# Altium PCB OCB_Board2.PcbDoc
Units mil, origin at the board's own origin, x right, y up, seen from the top; angles counter-clockwise.
Board outline 3500 x 3065 mil, 2 copper layers (Top Layer, Bottom Layer); 47 components, 33 nets, 154 pads, 20 vias.
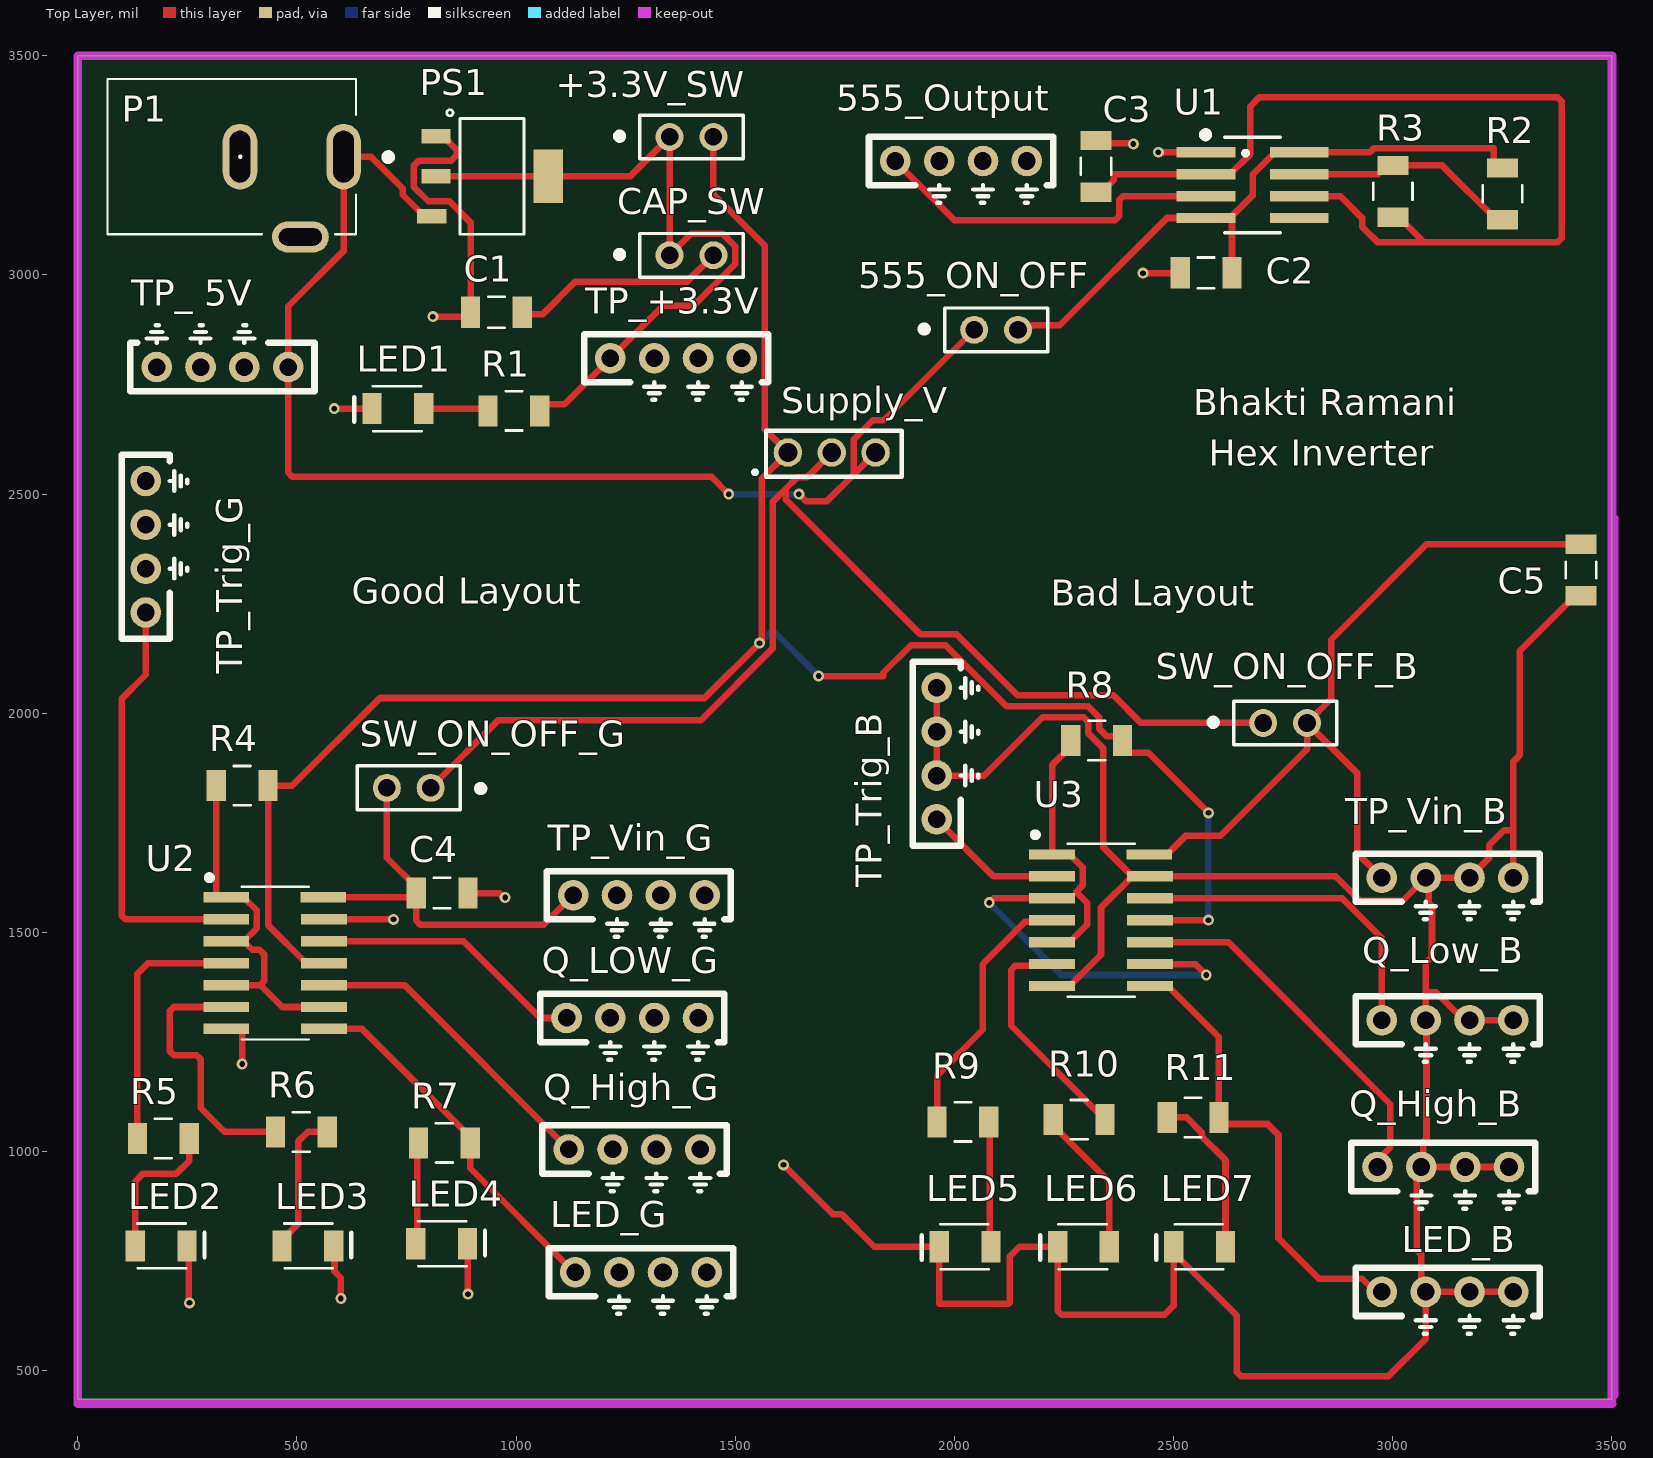
[diagram p0: Top Layer view]
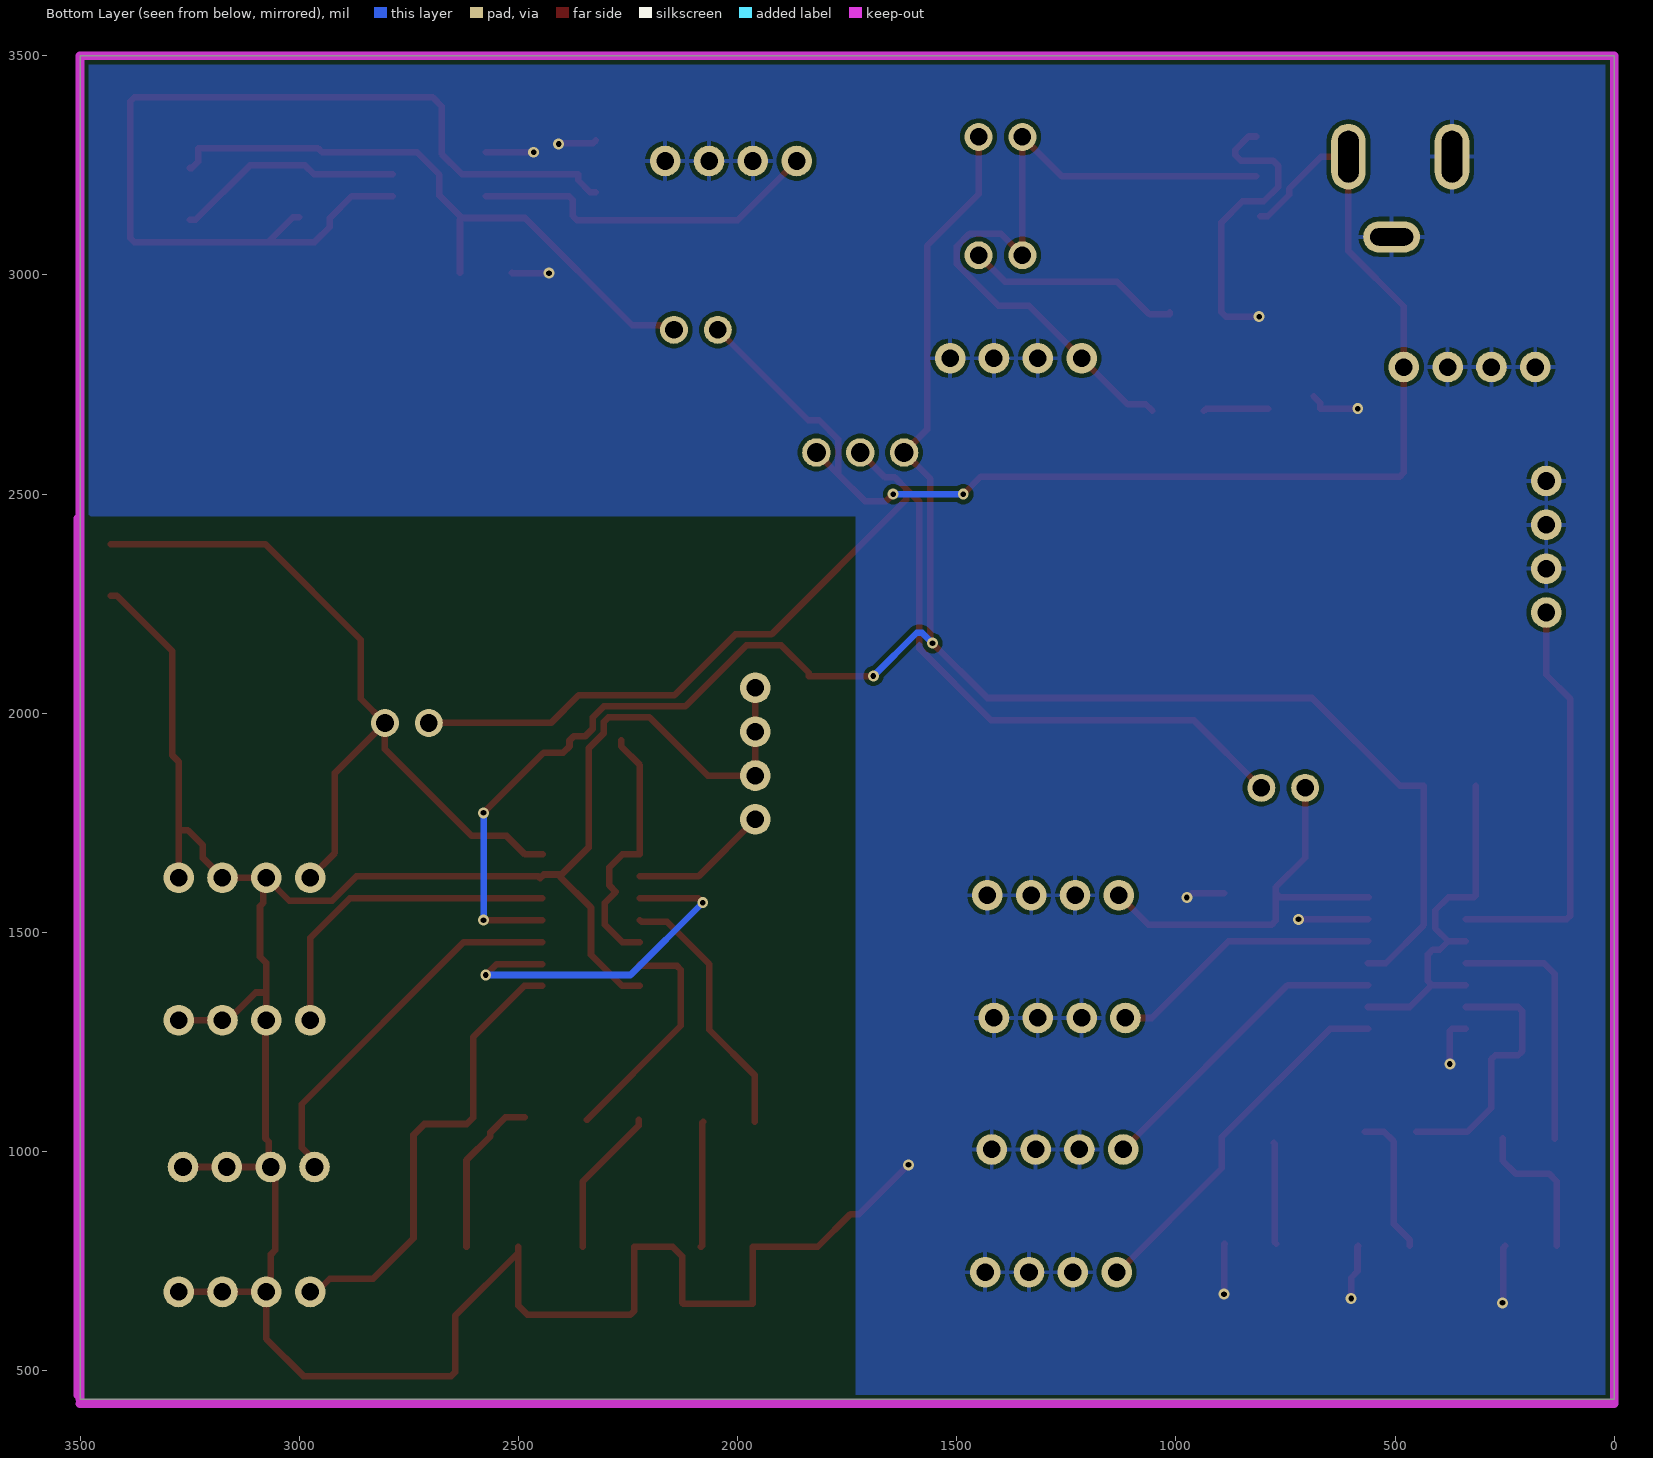
[diagram p1: Bottom Layer view, seen from below]
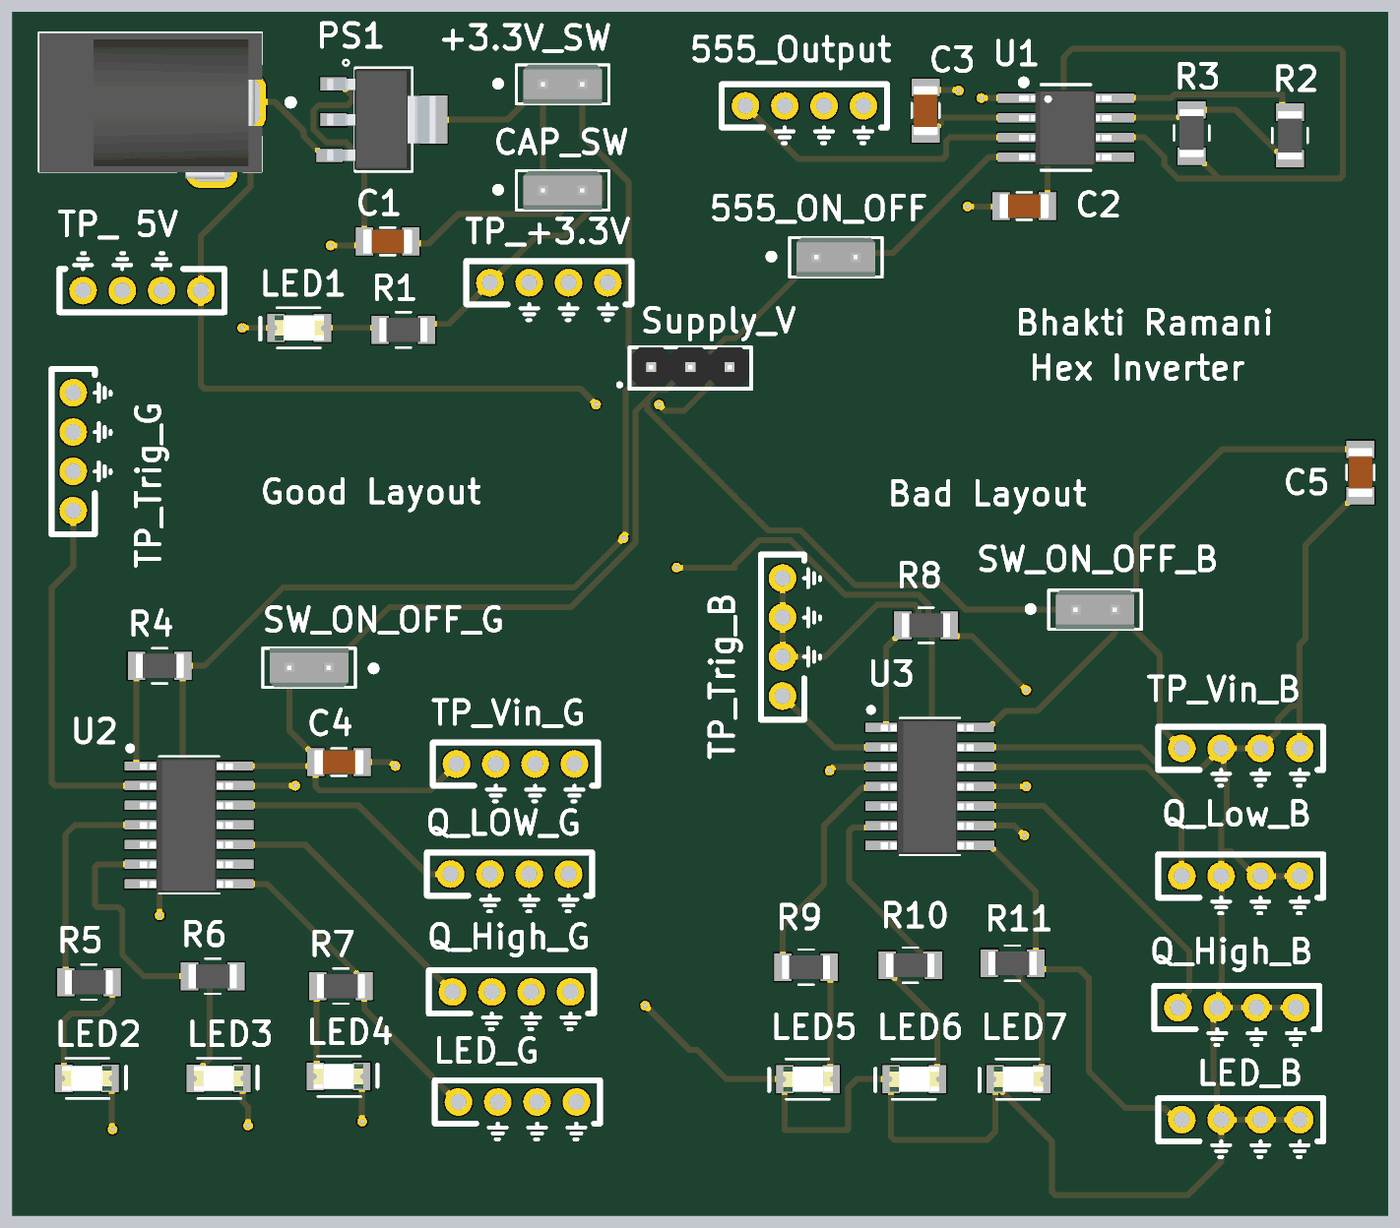
[diagram p2: 3D render of the assembled board from above, using the file's embedded part models]

## Layer stack, top to bottom
Top Solder: solder mask 0.4, Solder Resist, Dk 3.5
Top Layer: signal copper 1.4
Dielectric 1: dielectric 12.6, FR-4, Dk 4.8
Bottom Layer: signal copper 1.4
Bottom Solder: solder mask 0.4, Solder Resist, Dk 3.5

## Board outline
0,435 3500,435 3500,3500 0,3500

## Design rules (kind name [scope] priority, off if disabled: settings)
BoardOutlineClearance [All] p1: gap=10 ignorepadtopadclearanceinfootprint=FALSE except(0: Arc-SplitContinuation Track-SplitContinuation SMDPad-SplitContinuation THPad-SplitContinuation Via-SplitContinuation Fill-SplitContinuation Poly-SplitContinuation Region-SplitContinuation Text-SplitContinuation)
Clearance [All] p1: gap=10 ignorepadtopadclearanceinfootprint=FALSE
PlaneClearance [All] p1: clearance=10
PlaneConnect [All] p1: planeconnectstyle=Direct reliefexpansion=20 reliefentries=4 reliefconductorwidth=10 reliefairgap=10
PolygonConnect [All] p1: thpad.connectstyle=Relief thpad.reliefconductorwidth=10 thpad.reliefentries=4 thpad.polygonreliefangle="90 Angle" thpad.airgapwidth=10 smdpad.connectstyle=Direct smdpad.reliefconductorwidth=10 smdpad.reliefentries=4 smdpad.polygonreliefangle="90 Angle" smdpad.airgapwidth=10 via.connectstyle=Direct via.reliefconductorwidth=10 via.reliefentries=4 via.polygonreliefangle="90 Angle" via.airgapwidth=10
RoutingVias [All] p1: holewidth=13 width=25 viastyle="Through Hole" minholewidth=13 minwidth=25 maxholewidth=60 maxwidth=80
SolderMaskExpansion [All] p1: expansion=4 istentingtop=FALSE
SupplyNets "Schematic Supply Nets" [InNet('GND')] p1: voltage=0.000
Width "Schematic Width Constraint_8" [InNet('NetC5_2')] p1: maxlimit=100 minlimit=10 preferedwidth=20 minimp=50.000000 maximp=50.000000 favimp=50.000000
Width "Schematic Width Constraint_3" [InNet('Supply_V')] p2: maxlimit=100 minlimit=10 preferedwidth=20 minimp=50.000000 maximp=50.000000 favimp=50.000000
Width "Schematic Width Constraint_7" [InNet('Net+3.3V_SW_1')] p3: maxlimit=100 minlimit=10 preferedwidth=20 minimp=50.000000 maximp=50.000000 favimp=50.000000
Width "Schematic Width Constraint_5" [InNet('NetC4_2')] p4: maxlimit=100 minlimit=10 preferedwidth=20 minimp=50.000000 maximp=50.000000 favimp=50.000000
Width "Schematic Width Constraint_2" [InNet('Net555_ON_OFF_2')] p5: maxlimit=100 minlimit=10 preferedwidth=20 minimp=50.000000 maximp=50.000000 favimp=50.000000
Width "Schematic Width Constraint_1" [InNet('+5_V')] p6: maxlimit=100 minlimit=10 preferedwidth=20 minimp=50.000000 maximp=50.000000 favimp=50.000000
Width "Schematic Width Constraint" [InNet('+3.3V')] p7: maxlimit=100 minlimit=10 preferedwidth=20 minimp=50.000000 maximp=50.000000 favimp=50.000000
Width [All] p8: maxlimit=100 minlimit=6 preferedwidth=6 minimp=50.000000 maximp=50.000000 favimp=50.000000
28 further rules are at their usual default settings.

## Components (designator, comment, footprint, x,y, rotation, side; value= is the part's Value field where it differs from the comment)
555_ON_OFF "SW_2Pin_100mil_Switch" 2Pin-Header-Conn 2045,2875 r0 top
555_Output "555_Output" TP10x_Probe 2015,3260 r0 top
+3.3V_SW "SW_2Pin_100mil_Switch" 2Pin-Header-Conn 1350,3315 r0 top
C1 "22uF" 1206_Passive_Capacitor 955,2915 r0 top
C2 "22uF" 1206_Passive_Capacitor 2574,3005 r180 top
C3 "1uF" 1206_Passive_Capacitor 2323.04,3247.96 r90 top
C4 "22uF" 1206_Passive_Capacitor 831,1590 r180 top
C5 "22uF" 1206_Passive_Capacitor 3429.32,2327.02 r90 top
CAP_SW "SW_2Pin_100mil_Switch" 2Pin-Header-Conn 1350,3045 r0 top
LED1 "Red" LED_1206 730,2695 r180 top
LED2 "Red" LED_1206 190,785 r0 top
LED3 "Red" LED_1206 525,785 r0 top
LED4 "Red" LED_1206 830,790 r0 top
LED5 "Red" LED_1206 2024.32,783.02 r180 top
LED6 "Red" LED_1206 2294.32,783.02 r180 top
LED7 "Red" LED_1206 2559.32,783.02 r180 top
LED_B "10x Probe TP" TP10x_Probe 3125,680 r0 top
LED_G "10x Probe TP" TP10x_Probe 1285,725 r0 top
P1 "Power Jack" Power_Jack 606.22,3270 r180 top value="CONN PWR JACK 2X5.5MM SOLDER"
PS1 "AMS1117-5.0" LDO 945,3225 r270 top value="IC REG LINEAR 5V 1A SOT223"
Q_High_B "10x Probe TP" TP10x_Probe 3115,965 r0 top
Q_High_G "10x Probe TP" TP10x_Probe 1270,1005 r0 top
Q_Low_B "10x Probe TP" TP10x_Probe 3125,1300 r0 top
Q_LOW_G "10x Probe TP" TP10x_Probe 1265,1305 r0 top
R1 "47 Ohms" 1206_Passive_Resitor 995,2690 r0 top value=47Ohm
R2 "1k" 1206_Passive_Resitor 3250,3185 r90 top value=1K
R3 "1k" 1206_Passive_Resitor 3000,3191 r90 top value=1K
R4 "1k" 1206_Passive_Resitor 375,1835 r0 top value="1K Ohm"
R5 "2Ohm" 1206_Passive_Resitor 195,1030 r180 top value="50 Ohm"
R6 "2Ohm" 1206_Passive_Resitor 510,1045 r180 top value="50 Ohm"
R7 "2Ohm" 1206_Passive_Resitor 836.07,1020 r180 top value="50 Ohm"
R8 "1k" 1206_Passive_Resitor 2324.32,1938.02 r0 top value="1K Ohm"
R9 "2Ohm" 1206_Passive_Resitor 2019.32,1068.02 r180 top value="50 Ohm"
R10 "2Ohm" 1206_Passive_Resitor 2284.32,1073.02 r0 top value="50 Ohm"
R11 "2Ohm" 1206_Passive_Resitor 2544.32,1078.02 r180 top value="50 Ohm"
Supply_V "PREC003SAAN-RC" 3_PIN_100mil 1620,2595 r0 top value="CONN HEADER VERT 3POS 2.54MM"
SW_ON_OFF_B "SW_2Pin_100mil_Switch" 2Pin-Header-Conn 2704.32,1978.02 r0 top
SW_ON_OFF_G "SW_2Pin_100mil_Switch" 2Pin-Header-Conn 805,1830 r180 top
"TP_ 5V" "10x Probe TP" TP10x_Probe 330,2790 r180 top
TP_+3.3V "10x Probe TP" TP10x_Probe 1365,2810 r0 top
TP_Trig_B "10x Probe TP" TP10x_Probe 1959.32,1908.02 r90 top
TP_Trig_G "10x Probe TP" TP10x_Probe 155,2380 r90 top
TP_Vin_B "10x Probe TP" TP10x_Probe 3125,1625 r0 top
TP_Vin_G "10x Probe TP" TP10x_Probe 1280,1585 r0 top
U1 "LMC555CMX" TS555IDTTR 2680,3205 r0 top
U2 "SN74AHC14DR" HEX_74AC14 450,1430 r0 top
U3 "SN74AHC14DR" HEX_74AC14 2334.32,1528.02 r0 top

## Footprints (in the part's own frame and the unit in brackets; to place one, negate y for a bottom-side part, rotate by r counter-clockwise, add the part's x,y. Pads: shape width x height; smd on the part's side, far side on the other; paste and mask are expansions set on the pad)
2Pin-Header-Conn [mm]
  round 1.62 hole 1.02: 1(0,0) 2(2.54,0)
  silkscreen extent -3.02,-1.27 4.26,1.26, body extent -1.27,-1.27 3.81,1.27, height 8.13
3_PIN_100mil [mm]
  round 1.65 hole 1.1: 1(0,0) 2(2.54,0) 3(5.08,0)
  silkscreen extent -2,-1.4 6.6,1.27, body extent -1.14,-1.27 6.48,1.27, height 8.38
1206_Passive_Capacitor [mil]
  rect 44x71 smd: 1(-59,0) 2(59,0)
  silkscreen extent -19,-35 19,35, body extent -63,-31 63,32, height 50
1206_Passive_Resitor [mil]
  rect 44x71 smd: 1(-59,0) 2(59,0)
  silkscreen extent -19,-45 19,45, body extent -61,-31 61,31, height 26
HEX_74AC14 [mm]
  rect 2.65x0.6 smd: 1(-2.836,3.81) 2(-2.836,2.54) 3(-2.836,1.27) 4(-2.836,0) 5(-2.836,-1.27) 6(-2.836,-2.54) 7(-2.836,-3.81) 8(2.836,-3.81) 9(2.836,-2.54) 10(2.836,-1.27) 11(2.836,0) 12(2.836,1.27) 13(2.836,2.54) 14(2.794,3.81)
  silkscreen extent -3.94,-4.43 1.95,5.08, body extent -3.18,-4.35 2.82,4.3, height 1.75
LDO [mm]
  rect 0.838x1.7 smd: 1(-2.311,-3.25) 2(0,-3.25) 3(2.311,-3.5)
  rect 3.099x1.7 smd: 4(0,3.25)
  silkscreen extent -3.86,-2.62 3.35,1.85, body extent -3.25,-3.65 3.25,3.35, height 1.85
LED_1206 [mil]
  rect 44x71 smd: 1(-59,0) 2(59,0)
  silkscreen extent -54,-51 99,51, body extent -63,-31 63,31, height 28
Power_Jack [mm]
  oval 2x3.8 hole 1.2 slot 3 at 90 deg: 1(0,0) 2(6,0)
  oval 3.3x1.8 hole 1 slot 2.5 at 0 deg: 3(2.5,4.65)
  silkscreen extent -2.79,-4.5 13.68,4.5, body extent -0.76,-4.45 13.64,4.95, height 11.49
TP10x_Probe [mil] "Small Probs footprint"
  round 70 hole 40: 1(-150,0) 2(-50,0) 2(50,0) 2(150,0)
  silkscreen extent -210,-95 210,55
TS555IDTTR [mm] "IC OSC Single Timer 2.7MHz 8SOIC"
  rect 3.4x0.6 smd: 1(-2.7,1.905) 2(-2.7,0.635) 3(-2.7,-0.635) 4(-2.7,-1.905) 5(2.7,-1.905) 6(2.7,-0.635) 7(2.7,0.635) 8(2.7,1.905)
  silkscreen extent -2.85,-2.77 1.6,3.05, body extent -3.03,-2.48 2.96,2.43, height 1.75

## Part data
555_ON_OFF +3.3V_SW CAP_SW SW_ON_OFF_B SW_ON_OFF_G: "2Pin Header", LCSC Part#=C124375, Type=Extended
555_Output LED_B LED_G Q_High_B Q_High_G Q_Low_B Q_LOW_G "TP_ 5V" TP_+3.3V TP_Trig_B TP_Trig_G TP_Vin_B TP_Vin_G: library part TP_10x_Probe, "Test Point 300 mil centers"
C1 C2 C4 C5: library part C_22uF_1206, "22uF ±10% 25V X5R 1206 Multilayer Ceramic Capacitors MLCC - SMD/SMT RoHS", LCSC Part#=C12891, MFR Part #=CL31A226KAHNNNE, Datasheet=https://datasheet.lcsc.com/lcsc/1811031514_Samsung-Electro-Mechanics-CL31A226KAHNNNE_C12891.pdf, Type=basic
C3: library part C_1uF_1206, "MULTILAYER CERAMIC CAPACITORS MLCC - SMD/SMT 1UF 50V 1206 ROHS", LCSC Part#=C1848, MFR Part #=CL31B105KBHNNNE, Digikey Link=https://www.digikey.com/product-detail/en/C1206C105M4RACTU/399-8150-1-ND/3471873/?itemSeq=304982366, Type=Basic
LED1 LED2 LED3 LED4 LED5 LED6 LED7: library part LED_RED_1206, "Red 621~631nm 1206 Light Emitting Diodes (LED) RoHS", LCSC Part#=C93133, MFR Part #=15-21/R6C-FQ1R1B/2T, Datasheet=https://datasheet.lcsc.com/szlcsc/1811151241_Everlight-Elec-15-21-R6C-FQ1R1B-2T_C93133.pdf, Type=Extended
P1: library part "P_Power Jack", "Power Barrel Connector Jack 2.10mm ID (0.083\"), 5.50mm OD (0.217\") Through Hole, Right Angle", LCSC Part#=C136744, MFR Part #=PJ-102A, Digikey Link=https://www.digikey.com/product-detail/en/PJ-102A/CP-102A-ND/275425/?itemSeq=304982367, Type=Extended
PS1: library part PS_AMS_LDO_5V, "LOW DROPOUT REGULATORS(LDO) POSITIVE FIXED 1.3V @ 1A 15V 5V 1A SOT-223 ROHS", LCSC Part#=C6187, MFR Part #=AMS1117-5.0, Type=Basic
R1: library part R_47Ohm_1206, "47Ω ±5% 0.25W ±200ppm/℃ 1206 Chip Resistor - Surface Mount RoHS", LCSC Part#=C25384, MFR Part #=1206W4J0470T5E, Datasheet=https://datasheet.lcsc.com/lcsc/1811101020_UNI-ROYAL-Uniroyal-Elec-1206W4J0470T5E_C25384.pdf, Type=Extended
R2 R3 R4 R8: library part R_1K_1206, "CHIP RESISTOR - SURFACE MOUNT 1KOHMS ±1% 1/4W 1206 ROHS", LCSC Part#=C4410, MFR Part #=RNCP1206FTD1K00CT, Digikey Link=https://www.digikey.com/product-detail/en/RNCP1206FTD1K00/RNCP1206FTD1K00CT-ND/2240675/?itemSeq=304982373, Type=Basic
R5 R6 R7 R9 R10 R11: library part R_2Ohm_1206, "2Ω ±1% 0.25W ±400ppm/℃ 1206 Chip Resistor - Surface Mount RoHS", LCSC Part#=C17942, MFR Part #=1206W4F200KT5E, Datasheet=https://datasheet.lcsc.com/lcsc/1809050635_UNI-ROYAL-Uniroyal-Elec-1206W4F200KT5E_C17942.pdf, Type=Extended
Supply_V: library part SW_3Pin_100mil_Switch, "Connector Header Through Hole 3 position 0.100\" (2.54mm)", LCSC Part#=C49257, Digikey Link=https://www.digikey.com/product-detail/en/PREC003SAAN-RC/S1012EC-03-ND/2774851/?itemSeq=304982371, MFR Part #=PREC003SAAN-RC, Type=Extended
U1: library part U_555_Fast, "555 Type, Timer/Oscillator _Single_ IC 3MHz 8-SO", LCSC Part#=C90760, MFR Part #=LMC555CMX/NOPB, Package=SOIC-8, Digikey Link=https://www.digikey.com/product-detail/en/texas-instruments/LMC555CMX-NOPB/LMC555CMX-NOPBCT-ND/1010550, Type=Extended
U2 U3: library part U_74AHC14, "Inverter IC 6 Channel Schmitt Trigger 14-SOIC", LCSC Part#=C6942, Datasheet=https://datasheet.lcsc.com/szlcsc/ON-Semicon-ON-74AC14SCX_C5482.pdf, MFR Part #=SN74AHC14DR, Type=Extended

## Via types
v1: diameter 25/25 (per signal layer), hole 13, Top Layer to Bottom Layer, 12 vias
v2: diameter 25, hole 13, Top Layer to Bottom Layer, 8 vias

## Nets (pads, with @x,y where several pads share a name; then routed paths per layer and width w, separated by ;. In a path a pad name is that pad's centre, name@x,y a point inside that pad or via, vN(x,y) a via of type N, cw(c..) or ccw(c..) an arc to the next point about the centre after c; other vN are vias at no path point)
555_Output: 555_Output.1 U1.3 | length 808.7
  Top Layer w15: 555_Output.1 2000,3125 2366.21,3125 2376.04,3134.83 2376.04,3171.21 2384.83,3180 U1.3
+3.3V: +3.3V_SW.2 R4.2 R8.2 Supply_V.1 U2.11 U3.11 | length 4657.5
  Top Layer w15: U2.11 521.3,1430 434,1517.3 R4.2 489.33,1835 689.33,2035 1430,2035 v2(1555,2160) 1555,2162.71 1560,2167.71 1560,2535 Supply_V.1 1567.5,2647.5 1567.5,3066.72 1450,3184.22 +3.3V_SW.2 ; v2(1690,2085) 1837.5,2085 1837.5,2092.35 1900.15,2155 1980,2155 2118.98,2016.02 2304.92,2016.02 2329.82,1991.12 2329.82,1965.18 2347.6,1947.4 2373.93,1947.4 R8.2 2383.32,1924.52 2397.82,1910.02 2442.32,1910.02 v2(2579.32,1773.02) ; U3.11 v2(2579.32,1528.02)
  Bottom Layer w15: v2(1555,2160) 1578.79,2183.79 1591.21,2183.79 v2(1690,2085) ; v2(2579.32,1528.02) v2(2579.32,1773.02)
+5_V: 555_ON_OFF.1 "TP_ 5V.1" P1.1 PS1.3 Supply_V.3 | length 2910.2
  Top Layer w15: PS1.3 790.24,3134 741.08,3183.16 741.08,3197.01 668.09,3270 P1.1 606.22,3054.74 480,2928.52 480,2790 480,2548.79 488.79,2540 1445,2540 v2(1485,2500) ; v2(1645,2500) 1660.83,2484.17 1709.17,2484.17 1769.98,2544.98 ; Supply_V.3 1769.98,2544.98 ; 555_ON_OFF.1 1838.71,2668.71 1813.71,2668.71 1769.98,2624.98 1769.98,2544.98
  Bottom Layer w15: v2(1485,2500) v2(1645,2500)
GND: 555_Output.2 "TP_ 5V.2" C1.1 C2.2 C3.2 C4.1 C5.1 LED1.2 LED2.2 LED3.2 LED4.2 LED5.2 LED6.2 LED7.2 LED_B.2 LED_G.2 P1.2 P1.3 PS1.1 Q_High_B.2 Q_High_G.2 Q_Low_B.2 Q_LOW_G.2 TP_+3.3V.2 TP_Trig_B.2 TP_Trig_G.2 TP_Vin_B.2 TP_Vin_G.2 U1.1 U2.7 U2.13 U3.7 U3.13 | length 8890.3
  Top Layer w15: LED2.2 253.09,780.91 253.09,656.91 v1(255,655) ; U2.7 370.69,1280 375,1275.69 v1(375,1200) ; U2.13 v1(720,1530) ; LED3.2 585.56,783.44 585.56,727 600,712.56 v1(600,665) ; v1(585,2695) LED1.2 671,2708.5 LED1.2@685.5,2723 ; v1(810,2905) 886,2905 C1.1 896,3119.92 847.92,3168 799.33,3168 766.08,3201.25 766.08,3248.75 778.39,3261.05 851.92,3261.05 864.22,3273.36 864.22,3285.79 834.01,3316 PS1.1 ; LED4.2 889.5,789.5 889.5,675.5 v1(890,675) ; C4.1 962.29,1590 972.29,1580 v1(975,1580) ; v1(1610,970) 1722.32,857.68 1742.12,857.68 1816.78,783.02 LED5.2 1965.32,653.27 2124.21,653.27 2125.94,655 2125.94,760.85 2148.1,783.02 LED6.2 2235.32,637.02 2244.32,628.02 2479.32,628.02 2500.32,649.02 LED7.2@2500.32,769.52 ; TP_Trig_B.2@1959.32,2058.02 1959.32,1958.02 1959.32,1858.02 2067.88,1858.02 2200.88,1991.02 2294.56,1991.02 2304.82,1980.77 2304.82,1954.83 2339.73,1919.91 2339.73,1693.87 2401.28,1632.33 2441.66,1632.33 2450.28,1623.71 2454.59,1628.02 2869.67,1628.02 2925.19,1572.5 3022.5,1572.5 TP_Vin_B.2@3073.71,1623.71 ; 555_Output.2@2165,3260 555_Output.2@2179.88,3260 ; U3.7 2263.02,1378.02 2334.32,1449.32 2334.32,1556.72 U3.13@2405.61,1628.02 ; C3.2 2329.13,3300.87 2406.13,3300.87 v1(2408.04,3298.96) ; v1(2430,3004) 2514,3004 C2.2 ; v1(2465,3280) U1.1 ; LED7.2 LED7.2@2500.32,769.52 ; Q_High_B.2@3065,965 3165,965 Q_High_B.2@3265,965 ; TP_Vin_B.2@3075,1625 3081.82,1618.18 3081.82,1567.5 3089.32,1560 3089.32,1444.75 3075,1430.44 3075,1363.02 ; TP_Vin_B.2@3081.82,1625 3175,1625 3219.66,1669.66 3219.66,1698.89 3253.79,1733.02 3275,1733.02 ; LED_B.2@3275,680 LED_B.2@3075,680 ; Q_Low_B.2@3275,1300 3162.21,1300 3099.19,1363.02 3075,1363.02 ; TP_Vin_B.2@3275,1625 3275,1733.02 ; C5.1 3415.82,2268.02 3289.32,2141.52 3289.32,1904.06 3275,1889.75 3275,1733.02 ; LED7.2@2500.32,769.52 2644.39,625.44 2644.39,496.75 2653.18,487.96 2990.13,487.96 3075,572.83 LED_B.2@3075,680 ; LED_B.2@3075,680 3064.48,690.52 3064.48,765.55 3055.02,775 3055.02,955.02 3069.32,969.32 3069.32,1022.5 3076.82,1030 3076.82,1298.18 3075,1300 3075,1363.02
Hex1_A: R4.1 U2.1 U2.3 U2.5 U2.9 | length 856.2
  Top Layer w15: R4.1 316,1584.31 320.31,1580 U2.1 378.7,1580 408.01,1550.69 408.01,1509.31 U2.3@378.7,1480 ; U2.5 416.21,1380 ; U2.3 U2.3@378.7,1480 ; U2.9 466.21,1330 416.21,1380 ; U2.3@378.7,1480 398.09,1460.61 414.39,1460.61 425,1450 425,1388.79 416.21,1380
Hex2_A: R8.1 U3.1 U3.3 U3.5 U3.9 | length 1453.3
  Top Layer w15: v2(2079.32,1568.02) 2089.32,1578.02 U3.3 ; U3.5 2263.02,1478.02 2303.1,1518.1 2303.1,1567.24 2277.67,1592.67 2292.33,1607.33 2292.33,1648.71 2263.02,1678.02 U3.1 2222.66,1881.86 2265.32,1924.52 R8.1 ; U3.9 2549.32,1428.02 v2(2574.32,1403.02)
  Bottom Layer w15: v2(2079.32,1568.02) 2244.32,1403.02 v2(2574.32,1403.02)
Net555_ON_OFF_2: 555_ON_OFF.2 C2.1 R2.2 U1.4 U1.8 | length 1521.6
  Top Layer w15: 555_ON_OFF.2 2154.33,2884.33 2177.15,2884.33 2178.18,2885.36 2240,2885.36 2484.64,3130 U1.4 U1.4@2628.82,3130 ; U1.4@2575.69,3130 U1.4@2628.82,3130 ; C2.1 2633.13,3005.13 2633.13,3026.37 2633.13,3125.69 U1.4@2628.82,3130 ; R2.2 3245,3244 3230.5,3258.5 3230.5,3289.5 2957.25,3289.5 2947.75,3280 U1.8 2731.18,3280 2680,3228.82 2680,3181.18 U1.4@2628.82,3130
Net+3.3V_SW_1: +3.3V_SW.1 CAP_SW.1 PS1.2 PS1.4 R1.2 TP_+3.3V.1 | length 1647.2
  Top Layer w15: PS1.2 PS1.4 1260,3225 +3.3V_SW.1 CAP_SW.1 1399.39,3094.39 1470.46,3094.39 1499.39,3065.46 1499.39,3024.54 1404.85,2930 1335,2930 TP_+3.3V.1 1110,2705 1068.5,2705 1054,2690.5 R1.2
NetC1_2: C1.2 CAP_SW.2 | length 496.9
  Top Layer w15: C1.2 1014,2910 1060,2910 1135,2985 1390,2985 CAP_SW.2
NetC3_1: C3.1 R3.1 U1.2 U1.6 | length 2291.2
  Top Layer w15: C3.1 2336.54,3188.96 2363.5,3215.91 2363.5,3230 U1.2 2628.82,3230 2675,3276.18 2675,3385 2695,3405 3376.21,3405 3385,3396.21 3385,3083.79 3376.21,3075 3070.5,3075 ; U1.6 2880,3180 2930,3130 2930,3110 2965,3075 3070.5,3075 ; R3.1 3013.5,3132 3070.5,3075
NetC4_2: C4.2 SW_ON_OFF_G.2 TP_Vin_G.1 U2.14 | length 936.5
  Top Layer w15: U2.14 762,1580 C4.2 ; SW_ON_OFF_G.2 705,1670.5 772,1603.5 C4.2 ; TP_Vin_G.1 1063,1518 780.79,1518 772,1526.79 C4.2
NetC5_2: C5.2 SW_ON_OFF_B.2 TP_Vin_B.1 U3.14 | length 1816.2
  Top Layer w15: U3.14 2484.67,1678.02 2526.87,1720.22 2606.52,1720.22 2804.32,1918.02 SW_ON_OFF_B.2 ; TP_Vin_B.1 2918.44,1681.56 2918.44,1863.89 SW_ON_OFF_B.2 ; C5.2 3077.32,2386.02 2859.32,2168.02 2859.32,2033.02 SW_ON_OFF_B.2
NetLED1_1: LED1.1 R1.1 | length 149.1
  Top Layer w15: LED1.1 931,2695 R1.1
NetLED2_1: LED2.1 R5.1 | length 340.6
  Top Layer w15: LED2.1 131,932.21 148.79,950 225,950 254,979 R5.1
NetLED3_1: LED3.1 R6.1 | length 328.7
  Top Layer w15: LED3.1 466,798.5 502.5,835 502.5,1023 524.5,1045 R6.1
NetLED4_1: LED4.1 R7.2 | length 232.5
  Top Layer w15: LED4.1 774.04,793.04 774.04,1016.96 R7.2
NetLED5_1: LED5.1 R9.1 | length 287.1
  Top Layer w15: R9.1 2080.82,1065.52 2080.82,785.52 LED5.1
NetLED6_1: LED6.1 R10.1 | length 343
  Top Layer w15: R10.1 2225.32,1059.52 2353.32,931.52 LED6.1
NetLED7_1: LED7.1 R11.2 | length 376.2
  Top Layer w15: R11.2 2529.82,1078.02 2563.82,1044.02 2563.82,1035.27 2618.32,980.77 LED7.1
NetLED_B_1: LED_B.1 R11.1 U3.8 | length 1063.9
  Top Layer w15: U3.8 2486.32,1378.02 2603.32,1261.02 R11.1 2603.32,1077.52 2617.82,1063.02 2714.32,1063.02 2739.13,1038.2 2739.13,802.25 2831.38,710 2930.12,710 2960.12,680 LED_B.1
NetLED_G_1: LED_G.1 R7.1 U2.8 | length 845.1
  Top Layer w15: U2.8 648.57,1280 895.07,1033.5 R7.1 895.07,962 1132.07,725 LED_G.1
NetQ_High_B_1: Q_High_B.1 U3.10 | length 856.8
  Top Layer w15: U3.10 2624.32,1478.02 2994.32,1108.02 2994.32,1009.2 2965,979.88 Q_High_B.1
NetQ_High_G_1: Q_High_G.1 U2.10 | length 713.7
  Top Layer w15: U2.10 745,1380 Q_High_G.1
NetQ_Low_B_1: Q_Low_B.1 U3.12 | length 753.9
  Top Layer w15: U3.12 2884.32,1578.02 2974.32,1488.02 2974.32,1300.68 Q_Low_B.1
NetQ_LOW_G_1: Q_LOW_G.1 U2.12 | length 625.8
  Top Layer w15: U2.12 880.17,1480 1055.17,1305 Q_LOW_G.1
NetR2_1: R2.1 R3.2 U1.7 | length 523.3
  Top Layer w15: U1.7 2966.5,3230 2986.5,3250 3112.5,3250 3236.5,3126 R2.1
NetR5_2: R5.2 U2.4 | length 588.3
  Top Layer w15: R5.2 136,1406 160,1430 U2.4
NetR6_2: R6.2 U2.6 | length 606.7
  Top Layer w15: U2.6 218.79,1330 210,1321.21 210,1228.79 218.79,1220 271.21,1220 280,1211.21 280,1100 335,1045 R6.2
NetR9_2: R9.2 U3.4 | length 602.8
  Top Layer w15: R9.2 1960.32,1174.02 2064.32,1278.02 2064.32,1428.02 2160.59,1524.29 2218.94,1524.29 U3.4
NetR10_2: R10.2 U3.6 | length 529.3
  Top Layer w15: U3.6 2218.35,1423.71 2138.1,1423.71 2129.32,1414.92 2129.32,1287.02 R10.2
NetTP_Trig_B_1: TP_Trig_B.1 U3.2 | length 317.2
  Top Layer w15: TP_Trig_B.1 2089.32,1628.02 U3.2
NetTP_Trig_G_1: TP_Trig_G.1 U2.2 | length 956
  Top Layer w15: TP_Trig_G.1 155,2087.82 100,2032.82 100,1538.79 108.79,1530 U2.2
Supply_V: Supply_V.2 SW_ON_OFF_B.1 SW_ON_OFF_G.1 | length 2753.3
  Top Layer w15: SW_ON_OFF_G.1 959.66,1984.66 1422.09,1984.66 1585,2147.57 1585,2482.43 1615,2512.43 ; Supply_V.2 1663.25,2538.25 1640.82,2538.25 1615,2512.43 ; SW_ON_OFF_B.1 2425.56,1978.02 2362.56,2041.02 2143.98,2041.02 2005,2180 1922.57,2180 1615,2487.57 1615,2512.43
pads on no net: U1.5

## Polygon pours and split planes (outlines as drawn)
GND on Bottom Layer "GND_L02_P001" (solid, pour order 1): 5,3490.7 10,3485.7 10,15 3470,15 3490,35 3490,3490

## Keep-outs
Keep-Out Layer:
  lines w20: 0,435 0,3500 3500,3500 3500,435 ; 0,2425 0,425 3500,425 ; 3505,445 3505,2445

## Other copper
Bottom Layer:
  pour cut-out: 1730,2450 3475,2450 3475,435 1730,435

## Silkscreen, mask and mechanical layers (free items; w line width, h text height)
Top Overlay:
  text "Bhakti Ramani" at 2545,2680 h60
  text "Hex Inverter" at 2580,2565 h60
  text "Good Layout" at 625,2250 h60
  text "Bad Layout" at 2220,2245 h60